# Altium PCB Driver4BusV1.1.PcbDoc
Units mm, origin at the board's own origin, x right, y up, seen from the top; angles counter-clockwise.
Board outline 160 x 100 mm, 4 copper layers (Top Layer, Internal Plane 1, Internal Plane 2, Bottom Layer); 96 components, 130 nets, 760 pads, 93 vias.
Unrouted connection lines stored in the file: 1.
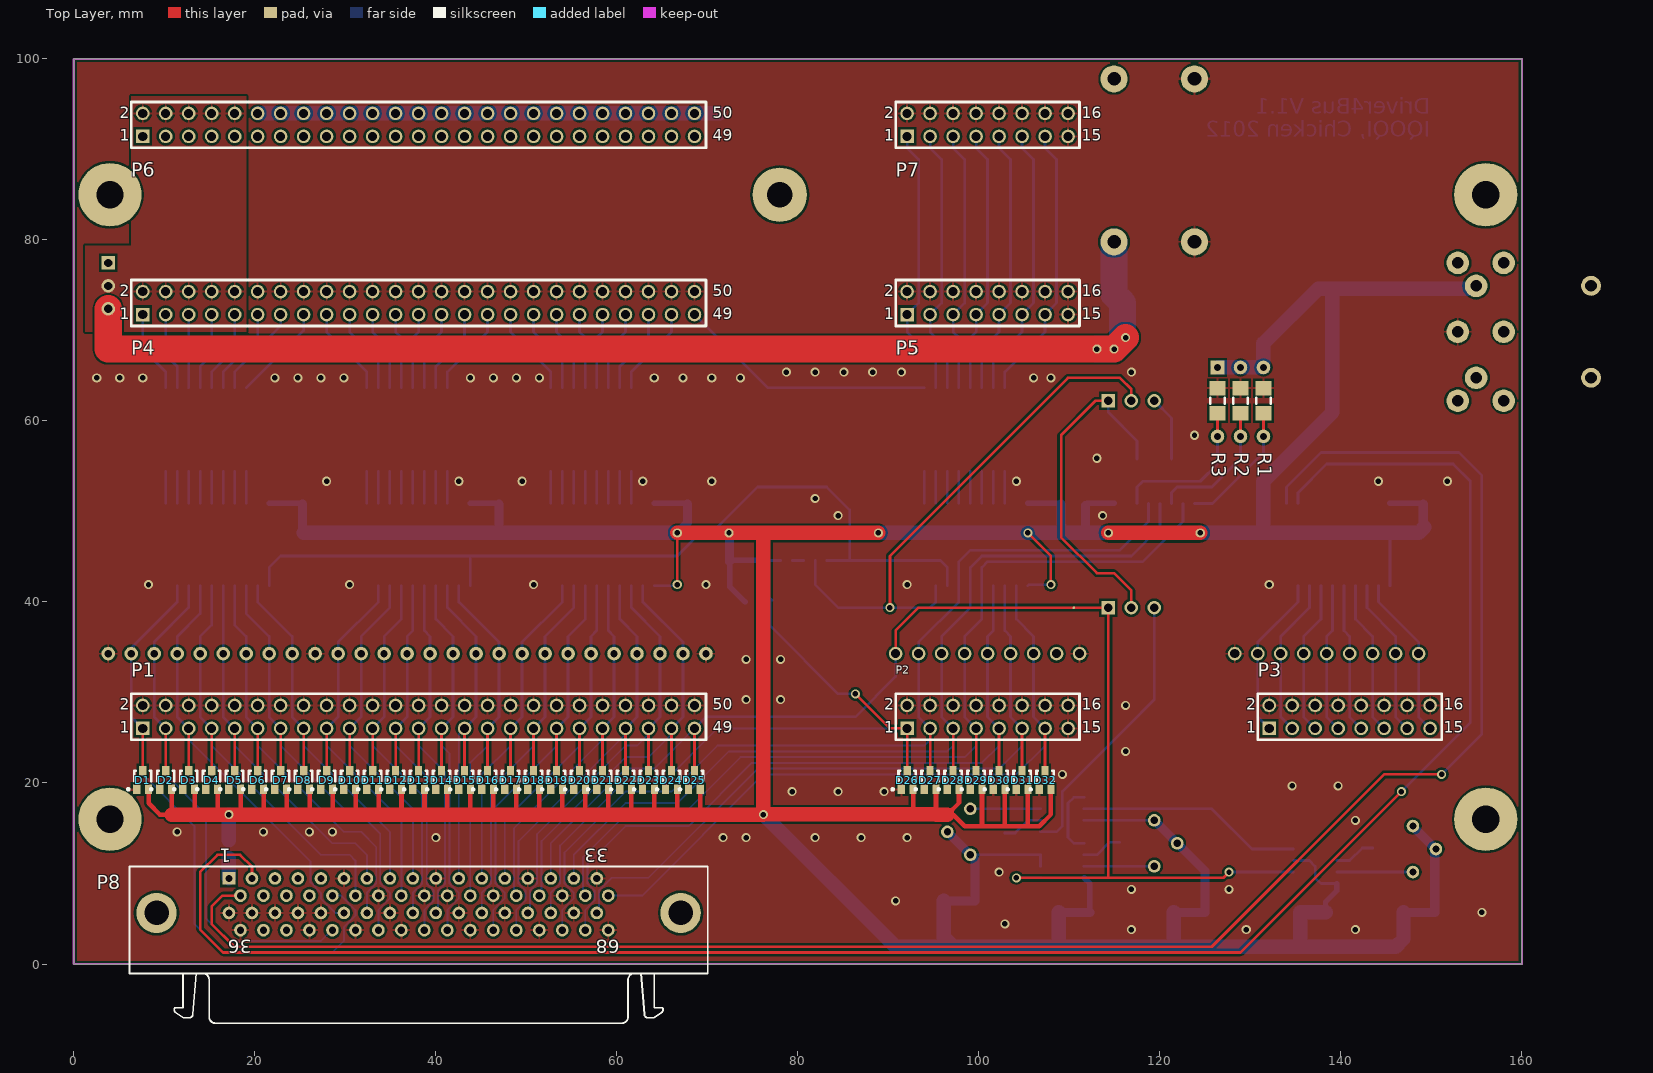
[diagram p0: Top Layer view]
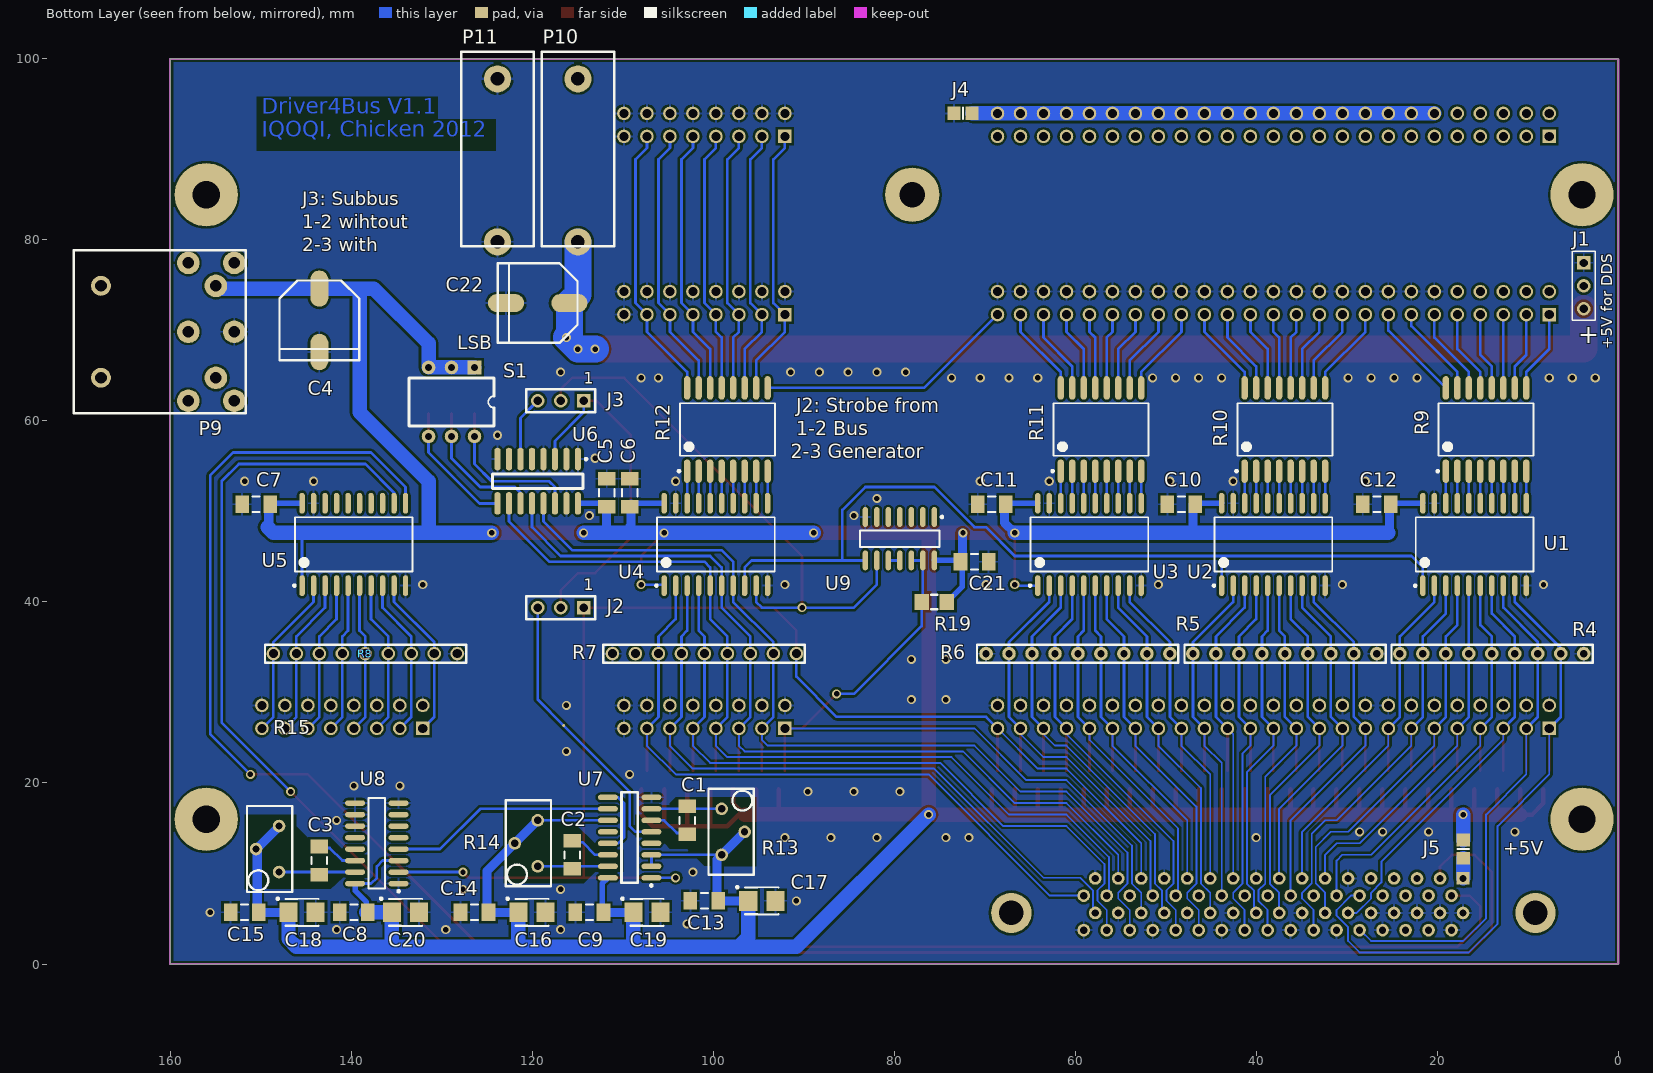
[diagram p1: Bottom Layer view, seen from below]
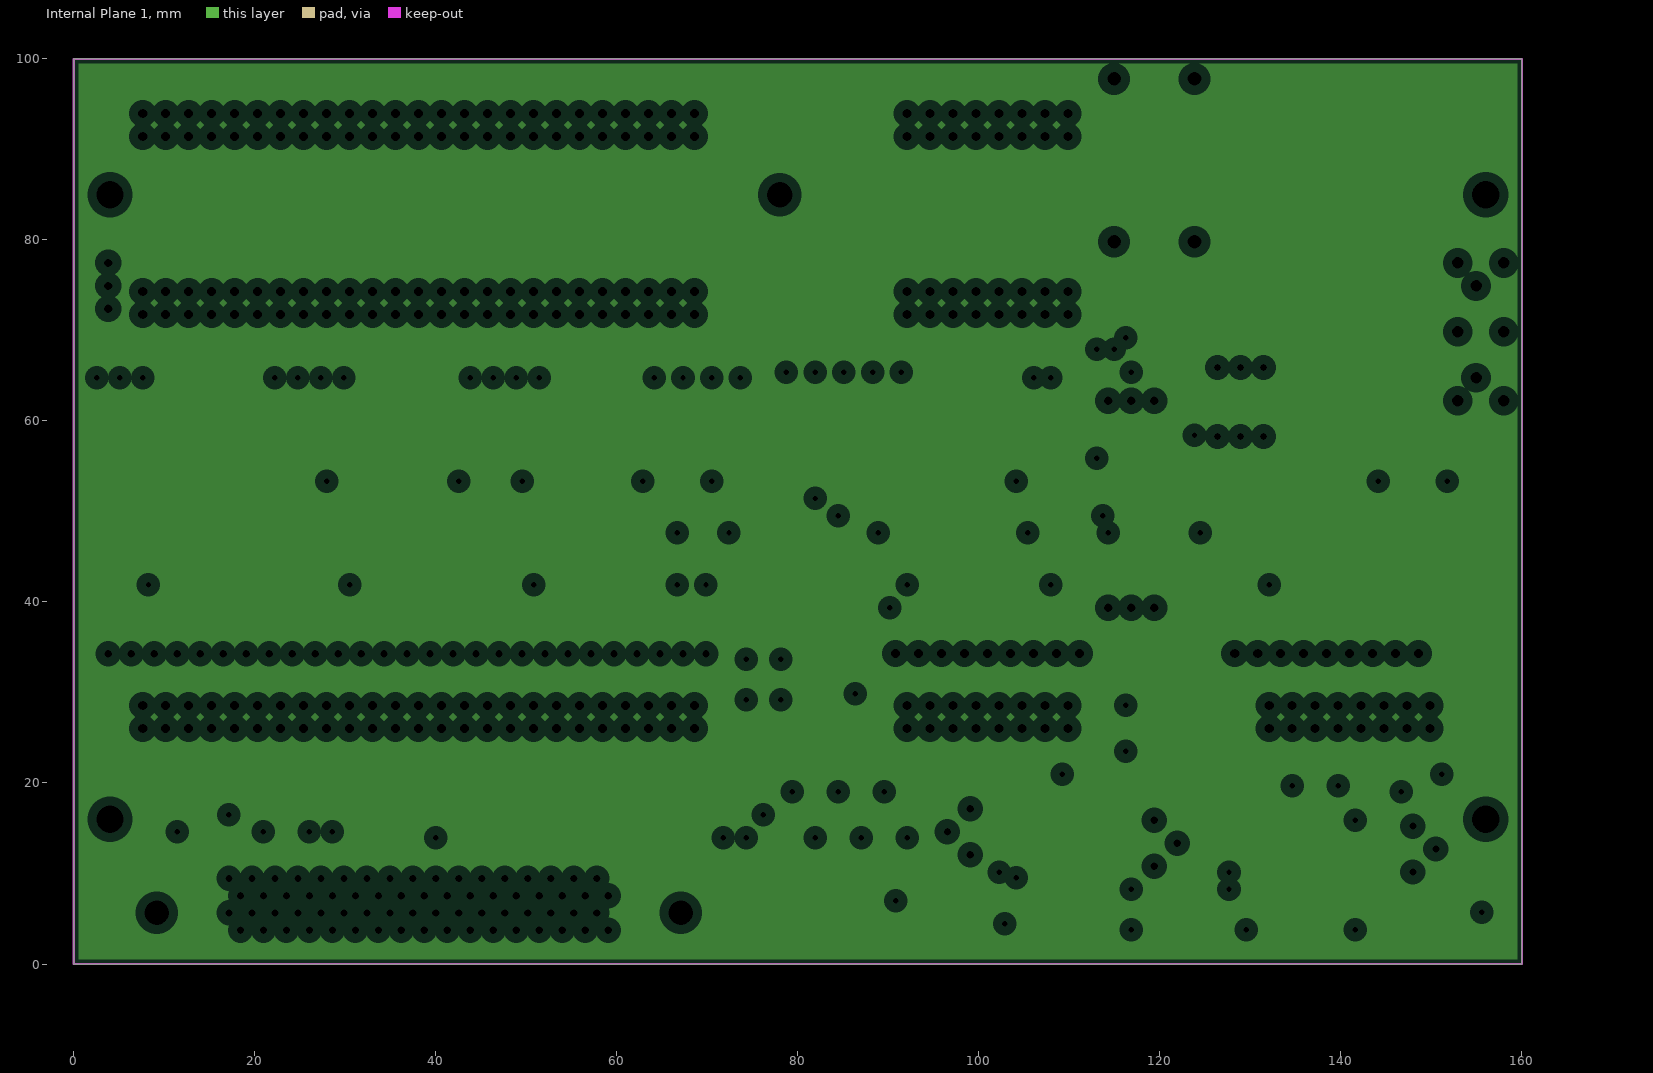
[diagram p2: Internal Plane 1, clearances drawn from the general rule]
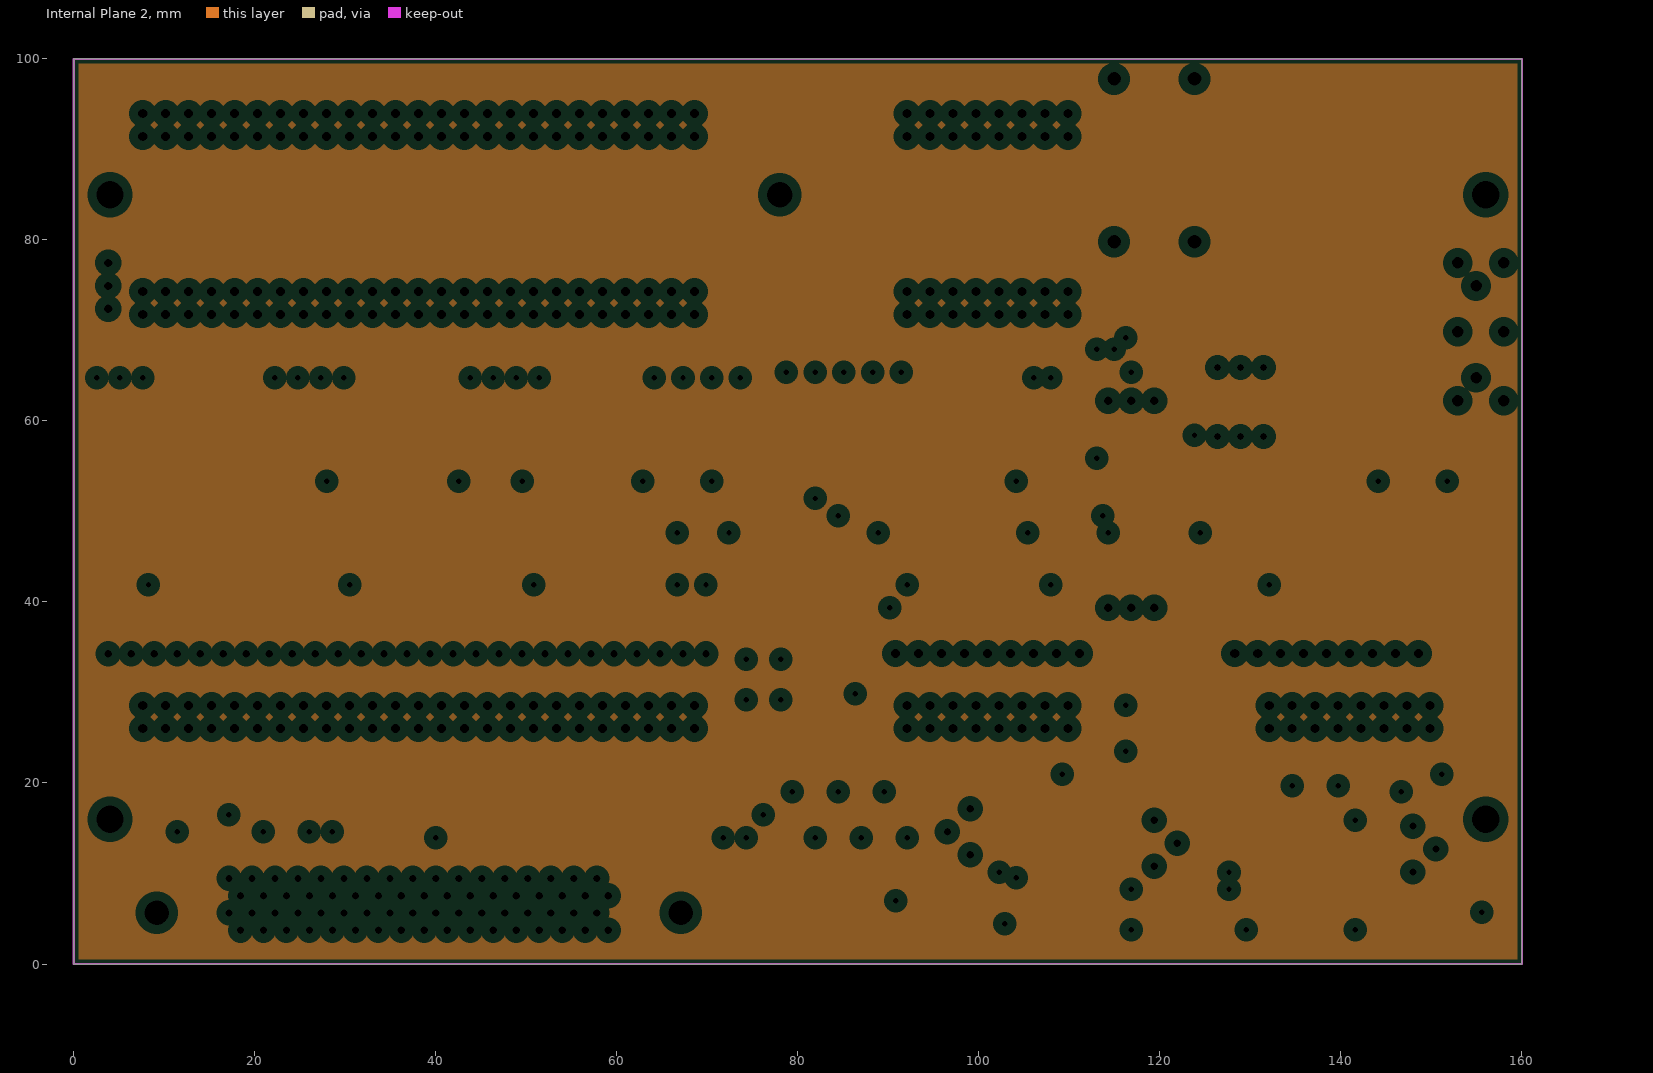
[diagram p3: Internal Plane 2, clearances drawn from the general rule]

## Layer stack, top to bottom
Top Solder: solder mask 0.0102, Solder Resist, Dk 3.5
Top Layer: signal copper 0.0356
Dielectric1: dielectric 0.32, FR-4, Dk 4.8
Internal Plane 1: plane copper 0.0356
Dielectric2: dielectric 0.32, FR-4, Dk 4.8
Internal Plane 2: plane copper 0.0356
Dielectric3: dielectric 0.32, FR-4, Dk 4.8
Bottom Layer: signal copper 0.0356
Bottom Solder: solder mask 0.0102, Solder Resist, Dk 3.5

## Board outline
0,0 160,0 160,90 160,100 0,100

## Design rules (kind name [scope] priority, off if disabled: settings)
Clearance [All] p1: gap=0.254
ComponentClearance ComponentClearance_1 [All] p2: gap=0.254 collisioncheckmode=3 verticalgap=0.254 showdistances=FALSE
FabricationTestPointUsage TestPointUsage [All] p1: valid=0 allowmultiple=FALSE
FabricationTestPointUsage TestPointUsage_1 [All] p2: valid=0 allowmultiple=FALSE
FabricationTestpoint Testpoint [All] p1: side=3 testpointundercomponent=TRUE minsize=1.016 maxsize=2.54 preferedsize=1.524 minholesize=0 maxholesize=1.016 preferedholesize=0.813 testpointgrid=0.025 allowsidetop=TRUE allowsidebottom=TRUE usegrid=TRUE gridtolerance=0
FabricationTestpoint Testpoint_1 [All] p2: side=3 testpointundercomponent=TRUE minsize=1.016 maxsize=2.54 preferedsize=1.524 minholesize=0 maxholesize=1.016 preferedholesize=0.813 testpointgrid=0.025 allowsidetop=TRUE allowsidebottom=TRUE usegrid=TRUE gridtolerance=0
FanoutControl Fanout_LCC [IsLCC] p1: bgadir=Out bgaviamode=Centered fanoutstyle=Auto fanoutdirection=Alternating viagrid=0.025 // Fanout_LCC (Default Rule)
FanoutControl Fanout_BGA [IsBGA] p2: bgadir=Out bgaviamode=Centered fanoutstyle=Auto fanoutdirection=Alternating viagrid=0.025 // Fanout_BGA (Default Rule)
FanoutControl Fanout_Small [(CompPinCount < 5)] p3: bgadir=Out bgaviamode=Centered fanoutstyle=Auto fanoutdirection=OutThenIn viagrid=0.025 // Fanout_Small (Default Rule)
FanoutControl Fanout_SOIC [IsSOIC] p4: bgadir=Out bgaviamode=Centered fanoutstyle=Auto fanoutdirection=Alternating viagrid=0.025 // Fanout_SOIC (Default Rule)
FanoutControl Fanout_BGA_1 [IsBGA] p6: bgadir=Out bgaviamode=Centered fanoutstyle=Auto fanoutdirection=Alternating viagrid=0.025 // Fanout_BGA (Default Rule)
FanoutControl Fanout_LCC_1 [IsLCC] p7: bgadir=Out bgaviamode=Centered fanoutstyle=Auto fanoutdirection=Alternating viagrid=0.025 // Fanout_LCC (Default Rule)
FanoutControl Fanout_SOIC_1 [IsSOIC] p8: bgadir=Out bgaviamode=Centered fanoutstyle=Auto fanoutdirection=Alternating viagrid=0.025 // Fanout_SOIC (Default Rule)
FanoutControl Fanout_Small_1 [(CompPinCount < 5)] p9: bgadir=Out bgaviamode=Centered fanoutstyle=Auto fanoutdirection=OutThenIn viagrid=0.025 // Fanout_Small (Default Rule)
FanoutControl Fanout_Default_1 [All] p10: bgadir=Out bgaviamode=Centered fanoutstyle=Auto fanoutdirection=Alternating viagrid=0.025 // Fanout_Default (Default Rule)
Height Height_1 [All] p2: minheight=0 maxheight=25.4 prefheight=12.7
HoleSize [All] p1: absolutevalues=TRUE maxlimit=3 minlimit=0.025 maxpercent=80.000 minpercent=20.000
LayerPairs LayerPairs_1 [All] p2: enforce=TRUE
PasteMaskExpansion PasteMaskExpansion_1 [All] p2: expansion=0
PlaneClearance [All] p1: clearance=1
PlaneConnect [All] p1: planeconnectstyle=Relief reliefexpansion=0.508 reliefentries=4 reliefconductorwidth=0.254 reliefairgap=0.254
PolygonConnect PolygonConnect_3 [(ObjectKind = 'Pad') And (Net = 'NetJ1_2') And (HoleDiameter = AsMM(0.9))] p1: connectstyle=Direct reliefconductorwidth=0.254 reliefentries=4 polygonreliefangle="90 Angle" airgapwidth=0.254
PolygonConnect PolygonConnect_2 [(ObjectKind = 'Via') And (Net = 'GND')] p2: connectstyle=Direct reliefconductorwidth=0.254 reliefentries=4 polygonreliefangle="90 Angle" airgapwidth=0.254
PolygonConnect PolygonConnect_1 [(ObjectKind = 'Pad') And (Net = 'NetP4_2') And (Component = 'P11')] p3: connectstyle=Direct reliefconductorwidth=0.254 reliefentries=4 polygonreliefangle="90 Angle" airgapwidth=0.254
PolygonConnect [All] p4: connectstyle=Relief reliefconductorwidth=0.254 reliefentries=4 polygonreliefangle="90 Angle" airgapwidth=0.254
RoutingLayers power [InNetClass('power')] p1: top layer_v5=TRUE bottom layer_v5=TRUE
RoutingLayers all [All] p2: top layer_v5=TRUE bottom layer_v5=TRUE
RoutingVias [All] p1: holewidth=0.6 width=1.6 viastyle="Through Hole" minholewidth=0.6 minwidth=1 maxholewidth=2 maxwidth=1.27
SilkToSolderMaskClearance SilkscreenOverComponentPads [IsPad] p1: minsilkscreentomaskgap=0.254 clearancetoexposedcopper=TRUE
SolderMaskExpansion [All] p1: expansion=0.102
SolderMaskExpansion SolderMaskExpansion_1 [All] p2: expansion=0.102
Width Width_power [InNetClass('power')] p1: maxlimit=1 minlimit=0.254 preferedwidth=0.5
Width [All] p2: maxlimit=3 minlimit=0.2 preferedwidth=0.3
18 further rules are at their usual default settings.

## Components (designator, comment, footprint, x,y, rotation, side; value= is the part's Value field where it differs from the comment)
C1 "Cap" CAPC3216M 102.87,15.875 r90 bottom
C2 "Cap" CAPC3216M 115.57,12.065 r270 bottom
C3 "Cap" CAPC3216M 143.51,11.43 r90 bottom
C4 "Cap Pol1" ElkoSMD8 143.51,71.12 r0 bottom
C5 "Cap" CAPC3216M 111.76,52.07 r270 bottom
C6 "Cap" CAPC3216M 109.22,52.07 r270 bottom
C7 "Cap" CAPC3216M 150.495,50.8 r180 bottom
C8 "Cap" CAPC3216M 139.7,5.715 r180 bottom
C9 "Cap" CAPC3216M 113.665,5.715 r180 bottom
C10 "Cap" CAPC3216M 48.26,50.8 r180 bottom
C11 "Cap" CAPC3216M 69.215,50.8 r180 bottom
C12 "Cap" CAPC3216M 26.67,50.8 r180 bottom
C13 "Cap" CAPC3216M 100.965,6.985 r180 bottom
C14 "Cap" CAPC3216M 126.365,5.715 r180 bottom
C15 "Cap" CAPC3216M 151.765,5.715 r180 bottom
C16 "Cap Pol1" TC3528-1411 120.015,5.715 r180 bottom
C17 "Cap Pol1" TC3528-1411 94.615,6.985 r180 bottom
C18 "Cap Pol1" TC3528-1411 145.415,5.715 r180 bottom
C19 "Cap Pol1" TC3528-1411 107.315,5.715 r180 bottom
C20 "Cap Pol1" TC3528-1411 133.985,5.715 r180 bottom
C21 "Cap" CAPC3216M 71.12,44.45 r0 bottom
C22 "Cap Pol1" ElkoSMD8 119.38,73.025 r90 bottom
D1 "1PS70SB14" SOT323 7.62,20.32 r0 top
D2 "1PS70SB14" SOT323 10.16,20.32 r0 top
D3 "1PS70SB14" SOT323 12.7,20.32 r0 top
D4 "1PS70SB14" SOT323 15.24,20.32 r0 top
D5 "1PS70SB14" SOT323 17.78,20.32 r0 top
D6 "1PS70SB14" SOT323 20.32,20.32 r0 top
D7 "1PS70SB14" SOT323 22.86,20.32 r0 top
D8 "1PS70SB14" SOT323 25.4,20.32 r0 top
D9 "1PS70SB14" SOT323 27.94,20.32 r0 top
D10 "1PS70SB14" SOT323 30.48,20.32 r0 top
D11 "1PS70SB14" SOT323 33.02,20.32 r0 top
D12 "1PS70SB14" SOT323 35.56,20.32 r0 top
D13 "1PS70SB14" SOT323 38.1,20.32 r0 top
D14 "1PS70SB14" SOT323 40.64,20.32 r0 top
D15 "1PS70SB14" SOT323 43.18,20.32 r0 top
D16 "1PS70SB14" SOT323 45.72,20.32 r0 top
D17 "1PS70SB14" SOT323 48.26,20.32 r0 top
D18 "1PS70SB14" SOT323 50.8,20.32 r0 top
D19 "1PS70SB14" SOT323 53.34,20.32 r0 top
D20 "1PS70SB14" SOT323 55.88,20.32 r0 top
D21 "1PS70SB14" SOT323 58.42,20.32 r0 top
D22 "1PS70SB14" SOT323 60.96,20.32 r0 top
D23 "1PS70SB14" SOT323 63.5,20.32 r0 top
D24 "1PS70SB14" SOT323 66.04,20.32 r0 top
D25 "1PS70SB14" SOT323 68.58,20.32 r0 top
D26 "1PS70SB14" SOT323 92.075,20.32 r0 top
D27 "1PS70SB14" SOT323 94.615,20.32 r0 top
D28 "1PS70SB14" SOT323 97.155,20.32 r0 top
D29 "1PS70SB14" SOT323 99.695,20.32 r0 top
D30 "1PS70SB14" SOT323 102.235,20.32 r0 top
D31 "1PS70SB14" SOT323 104.775,20.32 r0 top
D32 "1PS70SB14" SOT323 107.315,20.32 r0 top
J1 "Header 3" HDR1X3 3.81,77.47 r270 bottom
J2 "Generator" HDR1X3 114.3,39.37 r0 bottom
J3 "Subbus" HDR1X3 114.3,62.23 r0 bottom
J4 "Header 2" RESC2012M 72.39,93.98 r0 bottom
J5 "Header 2" RESC2012M 17.145,12.7 r270 bottom
P1 "Header 25X2" HDR2X25 7.62,26.035 r0 top
P2 "Header 8X2" HDR2X8 92.075,26.035 r0 top
P3 "Header 8X2" HDR2X8 132.08,26.035 r0 top
P4 "Header 25X2" HDR2X25 7.62,71.755 r0 top
P5 "Header 8X2" HDR2X8 92.075,71.755 r0 top
P6 "Header 25X2" HDR2X25 7.62,91.44 r0 top
P7 "Header 8X2" HDR2X8 92.075,91.44 r0 top
P8 "3-174682-7" 174225-5 38.1,-1.041 r180 top
P9 "Header 8" "DIN 8-polig V2" 167.64,69.85 r90 bottom
P10 "+5V DDS" "Banane on BCP" 114.935,88.79 r90 bottom
P11 "GND" "Banane on BCP" 123.825,88.79 r90 bottom
R1 "Res2" 3216[1206] 131.445,62.23 r270 top
R2 "Res2" 3216[1206] 128.905,62.23 r270 top
R3 "Res2" 3216[1206] 126.365,62.23 r270 top
R4 "Widerstandnetzwerk 4609X" "Widerstandnetzwerk 4609X"#1 3.81,34.29 r90 bottom
R5 "Widerstandnetzwerk 4609X" "Widerstandnetzwerk 4609X"#1 26.67,34.29 r90 bottom
R6 "Widerstandnetzwerk 4609X" "Widerstandnetzwerk 4609X"#1 69.85,34.29 r270 bottom
R7 "Widerstandnetzwerk 4609X" "Widerstandnetzwerk 4609X"#2 111.125,34.29 r270 bottom
R8 "Widerstandnetzwerk 4609X" "Widerstandnetzwerk 4609X"#2 128.27,34.29 r90 bottom
R9 "Res Pack2" SOIC-OE16_M 14.605,59.055 r90 bottom
R10 "Res Pack2" SOIC-OE16_M 36.83,59.055 r90 bottom
R11 "Res Pack2" SOIC-OE16_M 57.15,59.055 r90 bottom
R12 "Res Pack2" SOIC-OE16_M 98.425,59.055 r90 bottom
R13 "RPot" RPOT3 97.79,14.605 r0 bottom
R14 "RPot" RPOT3 120.65,13.335 r180 bottom
R15 "RPot" RPOT3 149.225,12.7 r180 bottom
R19 "Res2" 3216[1206] 75.565,40.005 r180 bottom
S1 "SW DIP-3" DIP-6 128.905,62.1 r0 bottom
U1 "74LVX245D" DW020_N 15.875,46.355 r90 bottom
U2 "74LVX245D" DW020_N 38.1,46.355 r90 bottom
U3 "74LVX245D" DW020_N 58.42,46.355 r90 bottom
U4 "74LVX245D" DW020_N 99.695,46.355 r90 bottom
U5 "74LVX245D" DW020_N 139.7,46.355 r90 bottom
U6 "74HC85" SO16_M 119.38,53.34 r270 bottom
U7 "74LV123" SO16_N 109.22,13.97 r0 bottom
U8 "74LV123" SO16_N 137.16,13.335 r0 bottom
U9 "74VHC00AD" 751A-02_N 79.375,46.99 r270 bottom

## Footprints (in the part's own frame and the unit in brackets; to place one, negate y for a bottom-side part, rotate by r counter-clockwise, add the part's x,y. Pads: shape width x height; smd on the part's side, far side on the other; paste and mask are expansions set on the pad)
751A-02_N [mm] "SOIC, 14-Leads, Body 8.7x3.9mm, Pitch 1.27mm, IPC Medium Density"
  oval 2.2x0.6 smd: 1(-2.4,3.81) 2(-2.4,2.54) 3(-2.4,1.27) 4(-2.4,0) 5(-2.4,-1.27) 6(-2.4,-2.54) 7(-2.4,-3.81) 8(2.4,-3.81) 9(2.4,-2.54) 10(2.4,-1.27) 11(2.4,0) 12(2.4,1.27) 13(2.4,2.54) 14(2.4,3.81)
  silkscreen extent -2.52,-4.4 0.9,4.78, body extent -1.95,-4.33 1.95,4.33, height 1.75
3216[1206] [mm] "Chip Resistor; Body 3.2 x 1.6 mm (LxW typ)"
  rect 1.6x1.8 smd: 1(-1.4,0) 2(1.4,0)
  silkscreen extent -0.3,-0.8 0.3,0.8
174225-5 [mm] "Connector; D Subminiature 050 Series; 68 Position; Right Angle"
  rect 1.4x1.4 hole 0.8: 1(20.955,-10.5)
  round 1.4 hole 0.8: 2(19.685,-8.595) 3(18.415,-10.5) 4(17.145,-8.595) 5(15.875,-10.5) 6(14.605,-8.595) 7(13.335,-10.5) 8(12.065,-8.595) 9(10.795,-10.5) 10(9.525,-8.595) 11(8.255,-10.5) 12(6.985,-8.595) 13(5.715,-10.5) 14(4.445,-8.595) 15(3.175,-10.5) 16(1.905,-8.595) 17(0.635,-10.5) 18(-0.635,-8.595) 19(-1.905,-10.5) 20(-3.175,-8.595) 21(-4.445,-10.5) 22(-5.715,-8.595) 23(-6.985,-10.5) 24(-8.255,-8.595) 25(-9.525,-10.5) 26(-10.795,-8.595) 27(-12.065,-10.5) 28(-13.335,-8.595) 29(-14.605,-10.5) 30(-15.875,-8.595) 31(-17.145,-10.5) 32(-18.415,-8.595) 33(-19.685,-10.5) 34(-20.955,-8.595) 35(20.955,-6.69) 36(19.685,-4.785) 37(18.415,-6.69) 38(17.145,-4.785) 39(15.875,-6.69) 40(14.605,-4.785) 41(13.335,-6.69) 42(12.065,-4.785) 43(10.795,-6.69) 44(9.525,-4.785) 45(8.255,-6.69) 46(6.985,-4.785) 47(5.715,-6.69) 48(4.445,-4.785) 49(3.175,-6.69) 50(1.905,-4.785) 51(0.635,-6.69) 52(-0.635,-4.785) 53(-1.905,-6.69) 54(-3.175,-4.785) 55(-4.445,-6.69) 56(-5.715,-4.785) 57(-6.985,-6.69) 58(-8.255,-4.785) 59(-9.525,-6.69) 60(-10.795,-4.785) 61(-12.065,-6.69) 62(-13.335,-4.785) 63(-14.605,-6.69) 64(-15.875,-4.785) 65(-17.145,-6.69) 66(-18.415,-4.785) 67(-19.685,-6.69) 68(-20.955,-4.785)
  round 4.45 hole 2.7: 69(28.955,-6.69) 70(-28.955,-6.69)
  silkscreen extent -31.95,-11.8 31.95,5.5
"Banane on BCP" [mm]
  round 3 hole 1.5: 1(-9,0) 1(9,0)
  silkscreen extent -9.5,-4 12,4
CAPC3216M [mm] "Chip Capacitor, Body 3.2x1.6mm, IPC Low Density"
  rect 1.5x1.9 smd: 1(-1.55,0) 2(1.55,0)
  silkscreen extent -0.4,-0.85 0.4,0.85, body extent -1.7,-0.9 1.7,0.9, height 1.35
"DIN 8-polig V2" [mm]
  round 2.2 hole 1.3: 0(-5.08,0) 0(5.08,0)
  round 2.5 hole 1.3: 1(-7.62,-9.652) 2(0,-9.652) 3(7.62,-9.652) 4(-5.08,-12.7) 5(5.08,-12.7) 6(-7.62,-14.732) 7(7.62,-14.732) 8(0,-14.732)
  silkscreen extent -9,-16 9,3
DIP-6 [mm] "DIP; 6 Leads; Row Spacing 7.62 mm; Pitch 2.54 mm"
  rect 1.5x1.5 hole 0.8: 1(-2.54,-3.81)
  round 1.5 hole 0.8: 2(0,-3.81) 3(2.54,-3.81) 4(2.54,3.81) 5(0,3.81) 6(-2.54,3.81)
  silkscreen extent -4.7,-2.65 4.7,2.65
DW020_N [mm] "SOIC, 20-Leads, Body 12.8x7.5mm, Pitch 1.27mm, IPC Medium Density"
  oval 2.3x0.6 smd: 1(-4.55,5.715) 2(-4.55,4.445) 3(-4.55,3.175) 4(-4.55,1.905) 5(-4.55,0.635) 6(-4.55,-0.635) 7(-4.55,-1.905) 8(-4.55,-3.175) 9(-4.55,-4.445) 10(-4.55,-5.715) 11(4.55,-5.715) 12(4.55,-4.445) 13(4.55,-3.175) 14(4.55,-1.905) 15(4.55,-0.635) 16(4.55,0.635) 17(4.55,1.905) 18(4.55,3.175) 19(4.55,4.445) 20(4.55,5.715)
  silkscreen extent -4.67,-6.5 3,6.69, body extent -3.75,-6.4 3.75,6.4, height 2.65
ElkoSMD8 [mm] "loe ESR Elko, D:8mm"
  oval 2x4 smd: 1(0,-3.5) 2(0,3.5)
  silkscreen extent -4.4,-4.4 4.4,4.4
HDR1X3 [mm] "Connector; Header; 3 Position"
  rect 1.5x1.5 hole 0.9: 1(0,0)
  round 1.5 hole 0.9: 2(2.54,0) 3(5.08,0)
  silkscreen extent -1.27,-1.27 6.35,1.27
HDR2X8 [mm] "Connector; Header; 8x2 Position"
  rect 1.5x1.5 hole 1: 1(0,0)
  round 1.5 hole 1: 2(0,2.54) 3(2.54,0) 4(2.54,2.54) 5(5.08,0) 6(5.08,2.54) 7(7.62,0) 8(7.62,2.54) 9(10.16,0) 10(10.16,2.54) 11(12.7,0) 12(12.7,2.54) 13(15.24,0) 14(15.24,2.54) 15(17.78,0) 16(17.78,2.54)
  silkscreen extent -1.27,-1.27 19.05,3.81
HDR2X25 [mm] "Connector; Header; 25x2 Position"
  rect 1.5x1.5 hole 1: 1(0,0)
  round 1.5 hole 1: 2(0,2.54) 3(2.54,0) 4(2.54,2.54) 5(5.08,0) 6(5.08,2.54) 7(7.62,0) 8(7.62,2.54) 9(10.16,0) 10(10.16,2.54) 11(12.7,0) 12(12.7,2.54) 13(15.24,0) 14(15.24,2.54) 15(17.78,0) 16(17.78,2.54) 17(20.32,0) 18(20.32,2.54) 19(22.86,0) 20(22.86,2.54) 21(25.4,0) 22(25.4,2.54) 23(27.94,0) 24(27.94,2.54) 25(30.48,0) 26(30.48,2.54) 27(33.02,0) 28(33.02,2.54) 29(35.56,0) 30(35.56,2.54) 31(38.1,0) 32(38.1,2.54) 33(40.64,0) 34(40.64,2.54) 35(43.18,0) 36(43.18,2.54) 37(45.72,0) 38(45.72,2.54) 39(48.26,0) 40(48.26,2.54) 41(50.8,0) 42(50.8,2.54) 43(53.34,0) 44(53.34,2.54) 45(55.88,0) 46(55.88,2.54) 47(58.42,0) 48(58.42,2.54) 49(60.96,0) 50(60.96,2.54)
  silkscreen extent -1.27,-1.27 62.23,3.81
RESC2012M [mm] "Chip Resistor, Body 2.0x1.3mm, IPC Low Density"
  rect 1.4x1.5 smd: 1(-1,0) 2(1,0)
  silkscreen extent 0,-0.65 0,0.65, body extent -1.07,-0.7 1.07,0.7, height 0.65
RPOT3 [mm] "Poti Y"
  round 1.4 hole 0.8: 1(1.27,-2.54) 2(-1.27,0) 3(1.27,2.54)
  silkscreen extent -2.27,-4.75 2.73,4.75
SO16_M [mm] "SOIC, 16-Leads, Body 9.9x3.9mm, Pitch 1.27mm, IPC Low Density"
  oval 2.5x0.7 smd: 1(-2.45,4.445) 2(-2.45,3.175) 3(-2.45,1.905) 4(-2.45,0.635) 5(-2.45,-0.635) 6(-2.45,-1.905) 7(-2.45,-3.175) 8(-2.45,-4.445) 9(2.45,-4.445) 10(2.45,-3.175) 11(2.45,-1.905) 12(2.45,-0.635) 13(2.45,0.635) 14(2.45,1.905) 15(2.45,3.175) 16(2.45,4.445)
  silkscreen extent -2.57,-5 0.8,5.47, body extent -2,-5 2,5, height 1.75
SO16_N [mm] "SOIC, 16-Leads, Body 9.9x3.9mm, Pitch 1.27mm, IPC Medium Density"
  oval 2.2x0.6 smd: 1(-2.4,4.445) 2(-2.4,3.175) 3(-2.4,1.905) 4(-2.4,0.635) 5(-2.4,-0.635) 6(-2.4,-1.905) 7(-2.4,-3.175) 8(-2.4,-4.445) 9(2.4,-4.445) 10(2.4,-3.175) 11(2.4,-1.905) 12(2.4,-0.635) 13(2.4,0.635) 14(2.4,1.905) 15(2.4,3.175) 16(2.4,4.445)
  silkscreen extent -2.52,-5 0.9,5.42, body extent -1.95,-4.95 1.95,4.95, height 1.75
SOIC-OE16_M [mm] "SOIC, 16-Leads, Body 10.3x7.5mm, Pitch 1.27mm, IPC Low Density"
  oval 2.6x0.7 smd: 1(-4.6,4.445) 2(-4.6,3.175) 3(-4.6,1.905) 4(-4.6,0.635) 5(-4.6,-0.635) 6(-4.6,-1.905) 7(-4.6,-3.175) 8(-4.6,-4.445) 9(4.6,-4.445) 10(4.6,-3.175) 11(4.6,-1.905) 12(4.6,-0.635) 13(4.6,0.635) 14(4.6,1.905) 15(4.6,3.175) 16(4.6,4.445)
  silkscreen extent -4.72,-5.25 2.9,5.47, body extent -3.75,-5.25 3.75,5.25, height 2.65
SOT323 [mm] "SOT-323/SC-70; 3 Leads; Body 2.2 x 2.2 mm, inc. leads (LxW max)"
  rect 0.8x1.05 smd: 1(-0.65,-1.025) 2(0.65,-1.025) 3(0,1.025)
  silkscreen extent -1.72,-1.15 0.95,1.02
TC3528-1411 [mm] "Capacitor, SM Tantalum; Body 3.5 x 2.8 mm (LxW typ)"
  rect 2x2.2 smd: 1(-1.5,0) 2(1.5,0)
  silkscreen extent -2.83,-1.5 1.85,1.62
"Widerstandnetzwerk 4609X"#1 [mm]
  round 1.5 hole 0.8: 1(0,0) 2(0,2.54) 3(0,5.08) 4(0,7.62) 5(0,10.16) 6(0,12.7) 7(0,15.24) 8(0,17.78) 9(0,20.32)
  silkscreen extent -1,-1 1,21.25
"Widerstandnetzwerk 4609X"#2 [mm]
  round 1.5 hole 1: 1(0,0) 2(0,2.54) 3(0,5.08) 4(0,7.62) 5(0,10.16) 6(0,12.7) 7(0,15.24) 8(0,17.78) 9(0,20.32)
  silkscreen extent -1,-1 1,21.25

## Part data
C1 C2 C3 C5 C6 C7 C8 C9 C10 C11 C12 C13 C14 C15 C21: "Capacitor"
C4 C16 C17 C18 C19 C20 C22: "Polarized Capacitor (Radial)"
D1 D2 D3 D4 D5 D6 D7 D8 D9 D10 D11 D12 D13 D14 D15 D16 D17 D18 D19 D20 D21 D22 D23 D24 D25 D26 D27 D28 D29 D30 D31 D32: "Schottky Barrier Double Diode"
J1: "Header, 3-Pin"
J2 J3: library part "Header 3", "Header, 3-Pin"
J4 J5: "Header, 2-Pin"
P1 P4 P6: "Header, 25-Pin, Dual row"
P2 P3 P5 P7: "Header, 8-Pin, Dual row"
P8: "Plug Assembly, Horizontal with Kink"
P9: "Header, 8-Pin"
P10 P11: library part Socket, "Socket"
R1 R2 R3 R19: "Resistor"
R9 R10 R11 R12: "Isolated Resistor Network - Parts"
R13 R14 R15: "Potentiometer"
S1: "DIP Switch, 3 Position, SPST"
U1 U2 U3 U4 U5: library part SN74HC245DW, "Octal Bus Transceiver with 3-State Outputs"
U6: library part M74HC85M1R, "4-Bit Magnitude Comparator"
U7 U8: library part M74HC123AM1R, "Dual Retriggerable Monostable Multivibrator"
U9: library part MC74HC00AD, "Quad 2-Input NAND Gate"

## Free pads (board coordinates)
  round 6 hole 2.8: 2(78,85)
  round 7 hole 3: 4(156,85) 5(156,16) 7(4,16) 8(4,85)
  round 0.5 smd: EndPad(17.145,16.51) StartPad(36.21,19.295)
  round 0.3 smd: EndPad(110.49,39.37) StartPad(114.3,39.37) StartPad(116.84,62.23)
  round 0.3 smd far side: EndPad(116.522,26.352) StartPad(118.745,50.89) StartPad(119.38,39.37) StartPad(120.015,50.89) StartPad(122.555,50.89)

## Via types
v1: diameter 1, hole 0.6, Top Layer to Bottom Layer, 93 vias

## Nets (pads, with @x,y where several pads share a name; then routed paths per layer and width w, separated by ;. In a path a pad name is that pad's centre, name@x,y a point inside that pad or via, vN(x,y) a via of type N, cw(c..) or ccw(c..) an arc to the next point about the centre after c; other vN are vias at no path point)
+5V: C22.1 J1.3 P10.1 | length 132.2
  Top Layer w3: J1.3 3.81,67.945 v1(113.03,67.945) v1(114.935,67.945) v1(116.205,69.215)
  Bottom Layer w3: v1(113.03,67.945) v1(114.935,67.945) v1(116.205,69.215) 115.88,69.54 C22.1 114.935,73.97 P10.1@114.935,79.79
+5V-NI: J5.2 P8.1 | length 2.2
  Bottom Layer w1.6: P8.1 J5.2
ACK1: P8.3 U5.12 | length 215.6
  Top Layer w0.3: P8.3 19.685,10.759 18.379,12.065 15.875,12.065 13.97,10.16 13.97,3.81 16.51,1.27 128.905,1.27 v1(146.685,19.05)
  Bottom Layer w0.3: U5.12 135.255,52.07 138.43,55.245 152.4,55.245 154.305,53.34 154.305,26.67 v1(146.685,19.05)
"CLOCK IN I": P3.1 R8.2 U5.9 | length 18.1
  Bottom Layer w0.3: P3.1 130.81,27.305 R8.2 130.81,35.56 135.255,40.005 U5.9
DIOA00: P4.1 R9.9 | length 9.2
  Bottom Layer w0.3: P4.1 7.62,67.945 10.16,65.405 R9.9
DIOA0: D1.3 P1.1 P8.10 R4.2 U1.9 | length 72.6
  Top Layer w0.3: D1.3 P1.1
  Bottom Layer w0.2: P1.1 7.62,20.955 13.335,15.24 13.335,4.445 16.51,1.27 28.575,1.27 29.845,2.54 29.845,4.064 31.115,5.334 31.115,5.969 29.53,7.554 P8.10
  Bottom Layer w0.3: P1.1 6.35,27.305 R4.2 6.35,34.925 11.43,40.005 U1.9
DIOA1: D2.3 P1.3 P8.44 R4.3 U1.8 | length 60.9
  Top Layer w0.3: D2.3 P1.3
  Bottom Layer w0.2: P1.3 10.16,20.955 14.605,16.51 14.605,5.08 17.145,2.54 27.305,2.54 28.509,3.744 P8.44
  Bottom Layer w0.3: P1.3 8.89,27.305 R4.3 8.89,35.56 12.7,39.37 U1.8
DIOA2: D3.3 P1.5 P8.45 R4.4 U1.7 | length 50.1
  Top Layer w0.3: D3.3 P1.5
  Bottom Layer w0.2: P1.5 12.7,24.765 26.162,11.303 26.162,9.017 27.305,7.874 27.305,7.239 28.895,5.649 P8.45
  Bottom Layer w0.3: P1.5 11.43,27.305 R4.4 11.43,36.195 13.97,38.735 U1.7
DIOA3: D4.3 P1.7 P8.12 R4.5 U1.6 | length 48.4
  Top Layer w0.3: D4.3 P1.7
  Bottom Layer w0.2: P1.7 15.24,24.13 27.305,12.065 30.48,12.065 31.115,11.43 P8.12
  Bottom Layer w0.3: P1.7 13.97,27.305 R4.5 13.97,36.195 15.24,37.465 U1.6
DIOA4: D5.3 P1.9 P8.13 R4.6 U1.5 | length 45.1
  Top Layer w0.3: D5.3 P1.9
  Bottom Layer w0.2: P1.9 17.78,24.13 28.575,13.335 31.115,13.335 32.385,12.065 P8.13
  Bottom Layer w0.3: U1.5 R4.6 16.51,27.305 P1.9
DIOA5: D6.3 P1.11 P8.47 R4.7 U1.4 | length 48.9
  Top Layer w0.3: D6.3 P1.11
  Bottom Layer w0.2: P1.11 20.32,24.13 29.845,14.605 31.75,14.605 33.426,12.929 33.426,8.915 32.385,7.874 P8.47
  Bottom Layer w0.3: U1.4 17.78,37.465 19.05,36.195 R4.7 19.05,27.305 P1.11
DIOA6: D7.3 P1.13 P8.48 R4.8 U1.3 | length 50.6
  Top Layer w0.3: D7.3 P1.13
  Bottom Layer w0.2: P1.13 22.86,24.13 31.115,15.875 32.385,15.875 33.858,14.402 33.858,8.941 34.925,7.874 34.925,7.239 33.655,5.969 P8.48
  Bottom Layer w0.3: U1.3 19.05,38.735 21.59,36.195 R4.8 21.59,27.305 P1.13
DIOA7: D8.3 P1.15 P8.15 R4.9 U1.2 | length 43.1
  Top Layer w0.3: D8.3 P1.15
  Bottom Layer w0.2: P1.15 25.4,24.13 34.925,14.605 P8.15
  Bottom Layer w0.3: U1.2 20.32,40.005 24.13,36.195 R4.9 24.13,27.305 P1.15
DIOA10: P4.3 R9.10 | length 8.6
  Bottom Layer w0.3: P4.3 10.16,67.31 11.43,66.04 R9.10
DIOA20: P4.5 R9.11 | length 8.1
  Bottom Layer w0.3: R9.11 P4.5
DIOA30: P4.7 R9.12 | length 8.6
  Bottom Layer w0.3: R9.12 13.97,66.04 15.24,67.31 P4.7
DIOA40: P4.9 R9.13 | length 9.2
  Bottom Layer w0.3: R9.13 15.24,65.405 17.78,67.945 P4.9
DIOA50: P4.11 R9.14 | length 9.7
  Bottom Layer w0.3: R9.14 16.51,65.405 20.32,69.215 P4.11
DIOA60: P4.13 R9.15 | length 10.2
  Bottom Layer w0.3: R9.15 17.78,65.405 22.86,70.485 P4.13
DIOA70: P4.15 R9.16 | length 10.7
  Bottom Layer w0.3: R9.16 25.4,70.005 P4.15
DIOB00: P4.17 R10.9 | length 9.9
  Bottom Layer w0.3: P4.17 27.94,69.85 32.385,65.405 R10.9
DIOB0: D9.3 P1.17 P8.16 R5.2 U2.9 | length 44.7
  Top Layer w0.3: D9.3 P1.17
  Bottom Layer w0.2: P1.17 27.94,24.13 36.195,15.875 P8.16
  Bottom Layer w0.3: P1.17 29.21,27.305 R5.2 29.21,35.56 33.655,40.005 U2.9
DIOB1: D10.3 P1.19 P8.17 R5.3 U2.8 | length 41.8
  Top Layer w0.3: D10.3 P1.19
  Bottom Layer w0.2: P1.19 30.48,24.13 37.465,17.145 P8.17
  Bottom Layer w0.3: P1.19 31.75,27.305 R5.3 31.75,36.195 34.925,39.37 U2.8
DIOB2: D11.3 P1.21 P8.51 R5.4 U2.7 | length 44.8
  Top Layer w0.3: D11.3 P1.21
  Bottom Layer w0.2: P1.21 33.02,24.13 38.481,18.669 38.481,8.89 37.465,7.874 P8.51
  Bottom Layer w0.3: P1.21 34.29,27.305 R5.4 34.29,36.195 36.195,38.1 U2.7
DIOB3: D12.3 P1.23 P8.52 R5.5 U2.6 | length 45.7
  Top Layer w0.3: D12.3 P1.23
  Bottom Layer w0.2: P1.23 35.56,24.13 38.989,20.701 38.989,8.89 39.751,8.128 39.751,6.985 38.735,5.969 P8.52
  Bottom Layer w0.3: P1.23 36.83,27.305 R5.5 36.83,36.195 37.465,36.83 U2.6
DIOB4: D13.3 P1.25 P8.53 R5.6 U2.5 | length 43.3
  Top Layer w0.3: D13.3 P1.25
  Bottom Layer w0.2: P1.25 38.1,24.13 41.021,21.209 41.021,8.89 40.259,8.128 40.259,5.903 P8.53
  Bottom Layer w0.3: P1.25 39.37,27.305 R5.6 39.37,36.195 38.735,36.83 U2.5
DIOB5: D14.3 P1.27 P8.54 R5.7 U2.4 | length 45.4
  Top Layer w0.3: D14.3 P1.27
  Bottom Layer w0.2: P1.27 40.64,24.13 41.529,23.241 41.529,8.89 42.545,7.874 42.545,7.239 41.275,5.969 P8.54
  Bottom Layer w0.3: U2.4 40.005,38.1 41.91,36.195 R5.7 41.91,27.305 P1.27
DIOB6: D15.3 P1.29 P8.21 R5.8 U2.3 | length 39.1
  Top Layer w0.3: D15.3 P1.29
  Bottom Layer w0.2: P8.21 42.545,25.4 P1.29
  Bottom Layer w0.3: U2.3 41.275,39.37 44.45,36.195 R5.8 44.45,27.305 P1.29
DIOB7: D16.3 P1.31 P8.22 R5.9 U2.2 | length 42.1
  Top Layer w0.3: D16.3 P1.31
  Bottom Layer w0.2: P8.22 43.815,22.225 45.72,24.13 P1.31
  Bottom Layer w0.3: U2.2 42.545,40.005 46.99,35.56 R5.9 46.99,27.305 P1.31
DIOB10: P4.19 R10.10 | length 9.4
  Bottom Layer w0.3: P4.19 30.48,69.85 33.655,66.675 R10.10
DIOB20: P4.21 R10.11 | length 8.9
  Bottom Layer w0.3: P4.21 33.02,69.85 34.925,67.945 R10.11
DIOB30: P4.23 R10.12 | length 8.4
  Bottom Layer w0.3: P4.23 35.56,69.85 36.195,69.215 R10.12
DIOB40: P4.25 R10.13 | length 8.4
  Bottom Layer w0.3: R10.13 37.465,69.215 38.1,69.85 P4.25
DIOB50: P4.27 R10.14 | length 8.9
  Bottom Layer w0.3: R10.14 38.735,67.945 40.64,69.85 P4.27
DIOB60: P4.29 R10.15 | length 9.4
  Bottom Layer w0.3: R10.15 40.005,66.04 43.18,69.215 P4.29
DIOB70: P4.31 R10.16 | length 9.9
  Bottom Layer w0.3: R10.16 41.275,65.405 45.72,69.85 P4.31
DIOC00: P4.33 R11.9 | length 9.9
  Bottom Layer w0.3: P4.33 48.26,69.85 52.705,65.405 R11.9
DIOC0: D17.3 P1.33 P8.23 R6.9 U3.9 | length 40.7
  Top Layer w0.3: D17.3 P1.33
  Bottom Layer w0.2: P8.23 45.085,20.955 48.26,24.13 P1.33
  Bottom Layer w0.3: P1.33 49.53,27.305 R6.9 49.53,35.56 53.975,40.005 U3.9
DIOC1: D18.3 P1.35 P8.57 R6.8 U3.8 | length 45.1
  Top Layer w0.3: D18.3 P1.35
  Bottom Layer w0.2: P8.57 45.085,7.874 46.101,8.89 46.101,19.431 50.8,24.13 P1.35
  Bottom Layer w0.3: P1.35 52.07,27.305 R6.8 52.07,36.195 55.245,39.37 U3.8
DIOC2: D19.3 P1.37 P8.58 R6.7 U3.7 | length 47.8
  Top Layer w0.3: D19.3 P1.37
  Bottom Layer w0.2: P8.58 46.355,5.969 47.625,7.239 47.625,7.874 46.609,8.89 46.609,17.399 53.34,24.13 P1.37
  Bottom Layer w0.3: P1.37 54.61,27.305 R6.7 54.61,36.195 56.515,38.1 U3.7
DIOC3: D20.3 P1.39 P8.25 R6.6 U3.6 | length 41.2
  Top Layer w0.3: D20.3 P1.39
  Bottom Layer w0.2: P8.25 47.625,15.875 55.88,24.13 P1.39
  Bottom Layer w0.3: P1.39 57.15,27.305 R6.6 57.15,36.195 57.785,36.83 U3.6
DIOC4: D21.3 P1.41 P8.26 R6.5 U3.5 | length 43.9
  Top Layer w0.3: D21.3 P1.41
  Bottom Layer w0.2: P8.26 48.641,7.808 48.641,14.986 58.42,24.765 P1.41
  Bottom Layer w0.3: P1.41 59.69,27.305 R6.5 59.69,36.195 59.055,36.83 U3.5
DIOC5: D22.3 P1.43 P8.60 R6.4 U3.4 | length 49.7
  Top Layer w0.3: D22.3 P1.43
  Bottom Layer w0.2: P8.60 48.895,5.969 49.911,6.985 49.911,8.128 49.149,8.89 49.149,13.589 60.96,25.4 P1.43
  Bottom Layer w0.3: U3.4 60.325,38.1 62.23,36.195 R6.4 62.23,27.305 P1.43
DIOC6: D23.3 P1.45 P8.61 R6.3 U3.3 | length 49
  Top Layer w0.3: D23.3 P1.45
  Bottom Layer w0.2: P8.61 50.419,5.903 50.419,8.128 51.181,8.89 51.181,14.351 60.96,24.13 62.23,24.13 63.5,25.4 P1.45
  Bottom Layer w0.3: U3.3 61.595,39.37 64.77,36.195 R6.3 64.77,27.305 P1.45
DIOC7: D24.3 P1.47 P8.28 R6.2 U3.2 | length 48.8
  Top Layer w0.3: D24.3 P1.47
  Bottom Layer w0.2: P8.28 51.689,7.808 51.689,13.589 60.96,22.86 63.5,22.86 66.04,25.4 P1.47
  Bottom Layer w0.3: U3.2 62.865,40.005 67.31,35.56 R6.2 67.31,27.305 P1.47
DIOC10: P4.35 R11.10 | length 9.4
  Bottom Layer w0.3: P4.35 50.8,69.85 53.975,66.675 R11.10
DIOC20: P4.37 R11.11 | length 8.9
  Bottom Layer w0.3: P4.37 53.34,69.85 55.245,67.945 R11.11
DIOC30: P4.39 R11.12 | length 8.4
  Bottom Layer w0.3: P4.39 55.88,69.85 56.515,69.215 R11.12
DIOC40: P4.41 R11.13 | length 8.4
  Bottom Layer w0.3: R11.13 57.785,69.215 58.42,69.85 P4.41
DIOC50: P4.43 R11.14 | length 8.9
  Bottom Layer w0.3: R11.14 59.055,67.945 60.96,69.85 P4.43
DIOC60: P4.45 R11.15 | length 9.4
  Bottom Layer w0.3: R11.15 60.325,66.04 63.5,69.215 P4.45
DIOC70: P4.47 R11.16 | length 9.9
  Bottom Layer w0.3: R11.16 61.595,65.405 66.04,69.85 P4.47
DIOD0: D25.3 J2.1 P1.49 P8.29 pad.EndPad@110.49,39.37 pad.StartPad@114.3,39.37 R7.9 U7.1 U8.2 | length 147.3
  Top Layer w0.3: D25.3 P1.49 ; R7.9 90.805,36.83 93.345,39.37 110.49,39.37 J2.1 114.3,9.525 ; v1(104.14,9.525) 114.3,9.525 ; v1(127.635,10.16) 127,9.525 114.3,9.525
  Bottom Layer w0.2: P8.29 52.705,13.335 60.96,21.59 64.135,21.59 P1.49
  Bottom Layer w0.3: P1.49 69.85,27.305 86.36,27.305 90.805,31.75 R7.9 ; v1(104.14,9.525) U7.1 ; v1(127.635,10.16) U8.2
DIOD1: D26.3 P2.1 P8.63 R19.1 U9.12 U9.13 | length 84.5
  Top Layer w0.3: v1(86.36,29.845) 90.17,26.035 P2.1 D26.3
  Bottom Layer w0.2: P8.63 52.705,7.874 53.721,8.89 53.721,13.081 60.96,20.32 65.405,20.32 71.12,26.035 P2.1
  Bottom Layer w0.3: R19.1 76.965,37.335 84.455,29.845 v1(86.36,29.845) ; R19.1@77.153,40.193 76.835,40.51 U9.13 U9.12
DIOD2: D27.3 P2.3 P8.64 pad.StartPad@118.745,50.89 R7.8 U4.7 U6.13 | length 106.6
  Top Layer w0.3: D27.3 P2.3
  Bottom Layer w0.2: P8.64 53.975,5.969 55.245,7.239 55.245,7.874 54.229,8.89 54.229,12.319 60.96,19.05 66.04,19.05 71.12,24.13 93.98,24.13 94.615,24.765 P2.3
  Bottom Layer w0.3: P2.3 93.345,27.305 R7.8 93.345,35.56 97.79,40.005 U4.7 97.79,44.45 99.06,45.72 115.57,45.72 118.745,48.895 U6.13
DIOD3: D28.3 P2.5 P8.31 pad.StartPad@120.015,50.89 R7.7 U4.6 U6.12 | length 101.2
  Top Layer w0.3: D28.3 P2.5
  Bottom Layer w0.2: P8.31 55.245,12.065 60.96,17.78 66.675,17.78 72.39,23.495 96.52,23.495 97.155,24.13 P2.5
  Bottom Layer w0.3: P2.5 95.885,27.305 R7.7 95.885,36.195 99.06,39.37 U4.6 99.06,43.815 100.33,45.085 116.84,45.085 120.015,48.26 U6.12
DIOD4: D29.3 P2.7 P8.32 pad.StartPad@122.555,50.89 R7.6 U4.5 U6.10 | length 104.9
  Top Layer w0.3: D29.3 P2.7
  Bottom Layer w0.2: P8.32 56.261,7.808 56.261,11.811 60.96,16.51 67.31,16.51 73.66,22.86 98.425,22.86 99.695,24.13 P2.7
  Bottom Layer w0.3: P2.7 98.425,27.305 R7.6 98.425,36.195 100.33,38.1 U4.5 100.33,43.815 100.965,44.45 118.11,44.45 122.555,48.895 U6.10
DIOD5: D30.3 P2.9 P8.66 R7.5 U4.4 | length 82.1
  Top Layer w0.3: D30.3 P2.9
  Bottom Layer w0.2: P8.66 56.515,5.969 57.531,6.985 57.531,8.128 56.769,8.89 56.769,11.049 60.96,15.24 67.945,15.24 74.93,22.225 100.33,22.225 102.235,24.13 P2.9
  Bottom Layer w0.3: U4.4 101.6,36.83 100.965,36.195 R7.5 100.965,27.305 P2.9
DIOD6: D31.3 P2.11 P8.67 R7.4 U4.3 | length 79.1
  Top Layer w0.3: D31.3 P2.11
  Bottom Layer w0.2: P8.67 58.039,5.903 58.039,8.128 59.436,9.525 63.5,9.525 75.565,21.59 102.235,21.59 104.775,24.13 P2.11
  Bottom Layer w0.3: U4.3 102.87,36.83 103.505,36.195 R7.4 103.505,27.305 P2.11
DIOD7: D32.3 P2.13 P8.34 R7.3 U4.2 | length 78.8
  Top Layer w0.3: D32.3 P2.13
  Bottom Layer w0.2: P8.34 62.799,7.554 76.2,20.955 104.14,20.955 107.315,24.13 P2.13
  Bottom Layer w0.3: U4.2 104.14,38.1 106.045,36.195 R7.3 106.045,27.305 P2.13
DIOD10: P5.1 P7.1 R12.10 | length 30.2
  Bottom Layer w0.3: P7.1 92.075,90.17 93.345,88.9 93.345,73.025 P5.1 92.075,69.85 95.25,66.675 R12.10
DIOD20: P5.3 P7.3 R12.11 | length 29.6
  Bottom Layer w0.3: P7.3 94.615,90.17 95.885,88.9 95.885,73.025 P5.3 94.615,69.85 96.52,67.945 R12.11
DIOD30: P5.5 P7.5 R12.12 | length 29.1
  Bottom Layer w0.3: P7.5 97.155,90.17 98.425,88.9 98.425,73.025 P5.5 97.155,69.85 97.79,69.215 R12.12
DIOD40: P5.7 P7.7 R12.13 | length 29.1
  Bottom Layer w0.3: R12.13 99.06,69.215 99.695,69.85 P5.7 100.965,73.025 100.965,88.9 99.695,90.17 P7.7
DIOD50: P5.9 P7.9 R12.14 | length 29.6
  Bottom Layer w0.3: R12.14 100.33,67.945 102.235,69.85 P5.9 103.505,73.025 103.505,88.9 102.235,90.17 P7.9
DIOD60: P5.11 P7.11 R12.15 | length 30.2
  Bottom Layer w0.3: R12.15 101.6,66.675 104.775,69.85 P5.11 106.045,73.025 106.045,88.9 104.775,90.17 P7.11
DIOD70: P5.13 P7.13 R12.16 | length 30.7
  Bottom Layer w0.3: R12.16 102.87,65.405 107.315,69.85 P5.13 108.585,73.025 108.585,88.9 107.315,90.17 P7.13
GND: C4.2 C5.1 C6.1 C7.1 C8.1 C9.1 C10.1 C11.1 C12.1 C13.1 C14.1 C15.1 C16.2 C17.2 C18.2 C19.2 C20.2 C21.1 C22.2 D1.1 D2.1 D3.1 D4.1 D5.1 D6.1 D7.1 D8.1 D9.1 D10.1 D11.1 D12.1 D13.1 D14.1 D15.1 D16.1 D17.1 D18.1 D19.1 D20.1 D21.1 D22.1 D23.1 D24.1 D25.1 D26.1 D27.1 D28.1 D29.1 D30.1 D31.1 D32.1 J1.1 J4.2 P1.2 P1.4 P1.6 P1.8 P1.10 P1.12 P1.14 P1.16 P1.18 P1.20 P1.22 P1.24 P1.26 P1.28 P1.30 P1.32 P1.34 P1.36 P1.38 P1.40 P1.42 P1.44 P1.46 P1.48 P1.50 P2.2 P2.4 P2.6 P2.8 P2.10 P2.12 P2.14 P2.15 P2.16 P3.2 P3.4 P3.6 P3.8 P3.10 P3.12 P3.14 P3.16 P4.12 P4.14 P4.16 P4.18 P4.20 P4.22 P4.24 P4.26 P4.28 P4.30 P4.32 P4.34 P4.36 P4.38 P4.40 P4.42 P4.44 P4.46 P4.48 P4.50 P5.2 P5.4 P5.6 P5.8 P5.10 P5.12 P5.14 P5.15 P5.16 P7.2 P7.4 P7.6 P7.8 P7.10 P7.12 P7.14 P7.15 P7.16 P8.11 P8.14 P8.18 P8.19 P8.20 P8.24 P8.27 P8.30 P8.33 P8.35 P8.36 P8.37 P8.39 P8.41 P8.42 P8.43 P8.46 P8.49 P8.50 P8.55 P8.56 P8.59 P8.62 P8.65 P8.68 P9.8 P11.1 R1.1 R2.1 R3.1 R4.1 R5.1 R6.1 R7.1 R8.1 U1.10 U1.19 U2.10 U2.19 U3.10 U3.19 U4.10 U4.19 U5.10 U5.19 U6.1 U6.2 U6.4 U6.8 U6.15 U7.8 U8.1 U8.8 U8.9 U8.10 U8.11 U9.7
  other v1: 116.84,3.81 129.54,3.81 141.605,3.81 102.87,4.445 155.575,5.715 90.805,6.985 116.84,8.255 127.635,8.255 102.235,10.16 40.005,13.97 71.755,13.97 74.295,13.97 81.915,13.97 86.995,13.97 92.075,13.97 11.43,14.605 20.955,14.605 26.035,14.605 28.575,14.605 141.605,15.875 79.375,19.05 84.455,19.05 89.535,19.05 134.62,19.685 139.7,19.685 109.22,20.955 116.205,23.495 116.205,28.575 74.295,29.21 78.105,29.21 74.295,33.655 78.105,33.655 8.255,41.91 30.48,41.91 50.8,41.91 69.85,41.91 92.075,41.91 132.08,41.91 84.455,49.53 113.665,49.53 81.915,51.435 27.94,53.34 42.545,53.34 49.53,53.34 62.865,53.34 70.485,53.34 104.14,53.34 144.145,53.34 151.765,53.34 113.03,55.88 123.825,58.42 2.54,64.77 5.08,64.77 7.62,64.77 22.225,64.77 24.765,64.77 27.305,64.77 29.845,64.77 43.815,64.77 46.355,64.77 48.895,64.77 51.435,64.77 64.135,64.77 67.31,64.77 70.485,64.77 73.66,64.77 106.045,64.77 107.95,64.77 78.74,65.405 81.915,65.405 85.09,65.405 88.265,65.405 91.44,65.405 116.84,65.405
NetC1_1: C1.1 U7.6 | length 4.5
  Bottom Layer w0.3: C1.1@102.87,14.475 104.01,14.475 105.41,15.875 U7.6
NetC1_2: C1.2 R13.1 U7.7 | length 7.8
  Bottom Layer w0.3: R13.1 U7.7
NetC2_1: C2.1 U7.14 | length 4.5
  Bottom Layer w0.3: U7.14 113.03,12.065 114.43,13.465 C2.1@115.57,13.465
NetC2_2: C2.2 R14.1 U7.15 | length 7.8
  Bottom Layer w0.3: U7.15 R14.1
NetC3_1: C3.1 R15.1 U8.15 | length 8.4
  Bottom Layer w0.3: U8.15 R15.1
NetC3_2: C3.2 U8.14 | length 4.5
  Bottom Layer w0.3: U8.14 140.97,11.43 142.37,12.83 C3.2@143.51,12.83
NetJ1_2: J1.2 P4.2 P4.4 P4.6 P4.8 P4.10 P6.2 P6.4 P6.6 P6.8 P6.10
NetJ2_2: J2.2 J3.1 U6.3 | length 37.9
  Top Layer w0.3: J3.1 112.9,62.23 109.09,58.42 109.09,47.12 113.03,43.18 114.935,43.18 116.84,41.275 J2.2
  Bottom Layer w0.3: J3.1 114.3,60.96 117.475,57.785 U6.3
NetJ2_3: J2.3 pad.EndPad@116.522,26.352 pad.StartPad@119.38,39.37 U7.5 | length 31
  Bottom Layer w0.3: U7.5 108.585,14.605 109.22,15.24 109.22,19.05 116.522,26.352 119.38,29.21 J2.3
NetJ3_2: J3.2 pad.StartPad@116.84,62.23 U4.9 U9.9 | length 61.5
  Top Layer w0.3: v1(90.17,39.37) 90.17,45.085 109.855,64.77 115.57,64.77 116.84,63.5 J3.2
  Bottom Layer w0.3: U9.9 81.915,41.91 84.455,39.37 v1(90.17,39.37) 94.615,39.37 95.25,40.005 U4.9
NetJ3_3: J3.3 U6.6 | length 7.2
  Bottom Layer w0.3: J3.3 121.285,60.325 U6.6
NetJ4_1: J4.1 P6.12 P6.14 P6.16 P6.18 P6.20 P6.22 P6.24 P6.26 P6.28 P6.30 P6.32 P6.34 P6.36 P6.38 P6.40 P6.42 P6.44 P6.46 P6.48 P6.50 | length 51.1
  Bottom Layer w1.6: P6.12 P6.14 P6.16 P6.18 P6.20 P6.22 P6.24 P6.26 P6.28 P6.30 P6.32 P6.34 P6.36 P6.38 P6.40 P6.42 P6.44 P6.46 J4.1
NetP3_5: P3.5 R8.4 U5.7 | length 17.1
  Bottom Layer w0.3: P3.5 135.89,27.305 R8.4 135.89,36.195 137.795,38.1 U5.7
NetP3_7: P3.7 R8.5 U5.6 | length 16.6
  Bottom Layer w0.3: U5.6 139.065,36.83 138.43,36.195 R8.5 138.43,27.305 P3.7
NetP3_9: P3.9 R8.6 U5.5 | length 16.6
  Bottom Layer w0.3: U5.5 140.335,36.83 140.97,36.195 R8.6 140.97,27.305 P3.9
NetP3_11: P3.11 R8.7 U5.4 | length 17.1
  Bottom Layer w0.3: U5.4 141.605,38.1 143.51,36.195 R8.7 143.51,27.305 P3.11
NetP3_13: P3.13 R8.8 U5.3 | length 17.6
  Bottom Layer w0.3: U5.3 142.875,39.37 146.05,36.195 R8.8 146.05,27.305 P3.13
NetP3_15: P3.15 R8.9 U5.2 | length 18.8
  Top Layer w0.3: P3.15@149.225,26.035 P3.15
  Bottom Layer w0.3: U5.2 144.145,40.005 148.59,35.56 R8.9 148.59,27.305 P3.15
NetR1_2: R1.2 S1.4 U6.9 | length 14.3
  Top Layer w0.3: S1.4 R1.2
  Bottom Layer w0.3: U6.9 125.82,50.89 131.445,56.515 S1.4
NetR2_2: R2.2 S1.5 U6.11 | length 15.3
  Top Layer w0.3: S1.5 R2.2
  Bottom Layer w0.3: U6.11 121.285,52.07 121.92,52.705 125.73,52.705 128.905,55.88 S1.5
NetR3_2: R3.2 S1.6 U6.14 | length 17.3
  Top Layer w0.3: S1.6 R3.2
  Bottom Layer w0.3: U6.14 117.475,52.705 118.11,53.34 124.46,53.34 126.365,55.245 S1.6
NetR9_1: R9.1 U1.18 | length 3.6
  Bottom Layer w0.3: U1.18 R9.1
NetR9_2: R9.2 U1.17 | length 3.6
  Bottom Layer w0.3: U1.17 R9.2
NetR9_3: R9.3 U1.16 | length 3.6
  Bottom Layer w0.3: U1.16 R9.3
NetR9_4: R9.4 U1.15 | length 3.6
  Bottom Layer w0.3: U1.15 R9.4
NetR9_5: R9.5 U1.14 | length 3.6
  Bottom Layer w0.3: U1.14 R9.5
NetR9_6: R9.6 U1.13 | length 3.6
  Bottom Layer w0.3: U1.13 R9.6
NetR9_7: R9.7 U1.12 | length 3.6
  Bottom Layer w0.3: U1.12 R9.7
NetR9_8: R9.8 U1.11 | length 3.6
  Bottom Layer w0.3: U1.11 R9.8
NetR10_1: R10.1 U2.18 | length 3.6
  Bottom Layer w0.3: U2.18 R10.1
NetR10_2: R10.2 U2.17 | length 3.6
  Bottom Layer w0.3: U2.17 R10.2
NetR10_3: R10.3 U2.16 | length 3.6
  Bottom Layer w0.3: U2.16 R10.3
NetR10_4: R10.4 U2.15 | length 3.6
  Bottom Layer w0.3: U2.15 R10.4
NetR10_5: R10.5 U2.14 | length 3.6
  Bottom Layer w0.3: U2.14 R10.5
NetR10_6: R10.6 U2.13 | length 3.6
  Bottom Layer w0.3: U2.13 R10.6
NetR10_7: R10.7 U2.12 | length 3.6
  Bottom Layer w0.3: U2.12 R10.7
NetR10_8: R10.8 U2.11 | length 3.6
  Bottom Layer w0.3: U2.11 R10.8
NetR11_1: R11.1 U3.18 | length 3.6
  Bottom Layer w0.3: U3.18 R11.1
NetR11_2: R11.2 U3.17 | length 3.6
  Bottom Layer w0.3: U3.17 R11.2
NetR11_3: R11.3 U3.16 | length 3.6
  Bottom Layer w0.3: U3.16 R11.3
NetR11_4: R11.4 U3.15 | length 3.6
  Bottom Layer w0.3: U3.15 R11.4
NetR11_5: R11.5 U3.14 | length 3.6
  Bottom Layer w0.3: U3.14 R11.5
NetR11_6: R11.6 U3.13 | length 3.6
  Bottom Layer w0.3: U3.13 R11.6
NetR11_7: R11.7 U3.12 | length 3.6
  Bottom Layer w0.3: U3.12 R11.7
NetR11_8: R11.8 U3.11 | length 3.6
  Bottom Layer w0.3: U3.11 R11.8
NetR12_1: R12.1 U4.18 | length 3.6
  Bottom Layer w0.3: U4.18 R12.1
NetR12_2: R12.2 U4.17 | length 3.6
  Bottom Layer w0.3: U4.17 R12.2
NetR12_3: R12.3 U4.16 | length 3.6
  Bottom Layer w0.3: U4.16 R12.3
NetR12_4: R12.4 U4.15 | length 3.6
  Bottom Layer w0.3: U4.15 R12.4
NetR12_5: R12.5 U4.14 | length 3.6
  Bottom Layer w0.3: U4.14 R12.5
NetR12_6: R12.6 U4.13 | length 3.6
  Bottom Layer w0.3: U4.13 R12.6
NetR12_7: R12.7 U4.12 | length 3.6
  Bottom Layer w0.3: U4.12 R12.7
NetR12_8: R12.8 U4.11 | length 3.6
  Bottom Layer w0.3: U4.11 R12.8
NetU1_1: U1.1 U2.1 U4.8 U9.8 | length 95.4
  Bottom Layer w0.3: U1.1 21.59,43.815 22.86,45.085 43.815,45.085 ; U2.1 43.815,45.085 ; U9.8 85.725,44.59 ; U4.8 96.52,43.815 95.745,44.59 85.725,44.59 ; 43.815,45.085 66.675,45.085 69.85,48.26 71.12,48.26 75.565,52.705 83.185,52.705 85.725,50.165 85.725,44.59
NetU7_9: U7.9 U7.13 | length 7.9
  Bottom Layer w0.3: U7.13 110.49,13.335 109.855,13.97 109.855,17.78 110.49,18.415 U7.9
NetU7_10: U7.10 U8.4 | length 25
  Bottom Layer w0.3: U7.10 125.73,17.145 130.175,12.7 U8.4
NetU9_10: U9.10 U9.11 | length 1.3
  Bottom Layer w0.3: U9.11 U9.10
REQ1: P8.2 U5.11 | length 211.3
  Top Layer w0.3: P8.2 16.444,7.554 15.24,6.35 15.24,4.445 17.78,1.905 125.73,1.905 144.78,20.955 v1(151.13,20.955)
  Bottom Layer w0.3: U5.11 133.985,52.705 137.795,56.515 153.035,56.515 155.575,53.975 155.575,25.4 v1(151.13,20.955)
"START TRIG I": P3.3 R8.3 U5.8 | length 17.6
  Bottom Layer w0.3: P3.3 133.35,27.305 R8.3 133.35,36.195 136.525,39.37 U5.8
STROBE: P4.49 R12.9 | length 28.8
  Bottom Layer w0.3: P4.49 76.68,63.655 R12.9
VCC: C4.1 C5.2 C6.2 C7.2 C8.2 C9.2 C10.2 C11.2 C12.2 C13.2 C14.2 C15.2 C16.1 C17.1 C18.1 C19.1 C20.1 C21.2 D1.2 D2.2 D3.2 D4.2 D5.2 D6.2 D7.2 D8.2 D9.2 D10.2 D11.2 D12.2 D13.2 D14.2 D15.2 D16.2 D17.2 D18.2 D19.2 D20.2 D21.2 D22.2 D23.2 D24.2 D25.2 D26.2 D27.2 D28.2 D29.2 D30.2 D31.2 D32.2 J5.1 P9.5 pad.EndPad@17.145,16.51 pad.StartPad@36.21,19.295 R13.2 R13.3 R14.2 R14.3 R15.2 R15.3 R19.2 S1.1 S1.2 S1.3 U1.20 U2.20 U3.1 U3.20 U4.1 U4.20 U5.1 U5.20 U6.16 U7.2 U7.3 U7.11 U7.16 U8.3 U8.16 U9.14 | length 666.7
  Top Layer w0.3: v1(66.675,41.91) v1(66.675,47.625) ; v1(105.41,47.625) 107.95,45.085 v1(107.95,41.91)
  Top Layer w0.5: D1.2 8.27,17.765 9.525,16.51 10.81,16.51 D2.2 ; 13.35,16.51 D3.2 ; 15.89,16.51 D4.2 ; 18.43,16.51 D5.2 ; 20.97,16.51 D6.2 ; 23.51,16.51 D7.2 ; 26.05,16.51 D8.2 ; 28.59,16.51 D9.2 ; 31.13,16.51 D10.2 ; 33.67,16.51 D11.2 ; 36.21,16.51 D12.2 ; 38.75,16.51 D13.2 ; 41.29,16.51 D14.2 ; 43.83,16.51 D15.2 ; 46.37,16.51 D16.2 ; 48.91,16.51 D17.2 ; 51.45,16.51 D18.2 ; 53.99,16.51 D19.2 ; 56.53,16.51 D20.2 ; 59.07,16.51 D21.2 ; 61.61,16.51 D22.2 ; 64.15,16.51 D23.2 ; 66.69,16.51 D24.2 ; 69.215,16.51 69.23,16.525 D25.2 ; 92.725,16.525 D26.2 ; 95.265,16.525 D27.2 ; D28.2 97.805,17.795 96.52,16.51 97.155,16.51 98.425,15.24 100.33,15.24 ; D29.2 100.345,15.255 100.33,15.24 ; D30.2 102.885,15.255 102.87,15.24 ; D31.2 105.425,15.255 105.41,15.24 ; D32.2 107.965,16.525 106.68,15.24 105.41,15.24 ; 100.33,15.24 102.87,15.24 ; 102.87,15.24 105.41,15.24
  Top Layer w1.6: 10.81,16.51 13.35,16.51 15.89,16.51 v1(17.145,16.51) 18.43,16.51 20.97,16.51 23.51,16.51 26.05,16.51 28.59,16.51 31.13,16.51 33.67,16.51 36.21,16.51 38.75,16.51 41.29,16.51 43.83,16.51 46.37,16.51 48.91,16.51 51.45,16.51 53.99,16.51 56.53,16.51 59.07,16.51 61.61,16.51 64.15,16.51 66.69,16.51 69.215,16.51 v1(76.2,16.51) ; v1(66.675,47.625) v1(72.39,47.625) 76.2,47.625 ; v1(88.9,47.625) 76.2,47.625 ; 96.52,16.51 95.265,16.51 95.265,16.525 92.725,16.525 76.215,16.525 v1(76.2,16.51) ; v1(114.3,47.625) v1(124.46,47.625) ; v1(76.2,16.51) 76.2,47.625
  Bottom Layer w0.3: U3.1 66.57,41.805 v1(66.675,41.91) ; R13.3 U7.3 U7.2 ; U4.1 105.515,41.91 v1(107.95,41.91) ; U7.11 R14.3 ; U8.3 136.525,11.43 137.16,10.795 137.16,9.525 137.795,8.89 U8.16 ; U5.1 145.415,47.625
  Bottom Layer w0.6: U1.20 25.165,50.905 C12.2@25.27,50.8 ; U2.20 46.755,50.905 46.757,50.904 46.882,50.848 C10.2@46.99,50.8 ; U3.20 67.71,50.905 C11.2@67.815,50.8 ; R19.2 72.47,41.7 72.47,44.45 72.61,44.59 U9.14 ; U4.20 108.985,50.905 109.09,50.8 C6.2@109.22,50.67 ; U7.16 112.265,8.88 C9.2@112.265,5.715 ; C5.2@111.76,50.67 111.98,50.89 U6.16 ; C8.2@138.3,5.715 138.3,6.855 139.56,8.115 U8.16 ; U5.20 148.99,50.905 C7.2@149.095,50.8
  Bottom Layer w1: C12.2@25.27,50.8 25.27,47.755 25.4,47.625 ; 46.99,47.625 C10.2@46.99,50.8 ; v1(66.675,47.625) 67.815,48.765 C11.2@67.815,50.8 ; C21.2@72.47,44.45 v1@72.47,47.625 ; C17.1 C13.2 99.565,6.985 99.565,11.56 R13.3 R13.2 ; C19.1 C9.2 C9.2@112.265,5.715 ; C6.2@109.09,50.8 109.09,48.39 109.22,48.26 ; 111.76,48.26 C5.2 C5.2@111.76,50.67 ; R14.3 R14.2 124.965,10.29 124.965,5.715 C14.2 C16.1 ; C18.1 C15.2 150.365,5.715 150.365,12.57 R15.2 R15.3 ; 149.095,48.26 C7.2@149.095,50.8
  Bottom Layer w1.6: J5.1 v1(17.145,16.51) ; 25.4,47.625 46.99,47.625 v1(66.675,47.625) ; v1(76.2,16.51) 90.805,1.905 97.155,1.905 ; v1(88.9,47.625) v1(105.41,47.625) v1(114.3,47.625) ; C17.1 96.115,2.945 97.155,1.905 ; C19.1 108.815,2.135 108.585,1.905 ; C16.1 121.515,2.135 121.285,1.905 ; v1(124.46,47.625) 131.445,47.625 ; S1.1 S1.2 S1.3 131.445,68.58 137.485,74.62 139.065,74.62 ; C8.2@138.3,5.715 C8.2 C20.1 135.485,2.135 135.255,1.905 ; C18.1 146.915,2.77 146.05,1.905 135.255,1.905 ; 149.225,48.26 148.59,47.625 145.415,47.625 131.445,47.625 ; P9.5 154.63,74.62 C4.1 139.065,74.62 ; 97.155,1.905 108.585,1.905 ; 108.585,1.905 121.285,1.905 ; 121.285,1.905 135.255,1.905 ; 131.445,47.625 131.445,53.34 139.065,60.96 139.065,74.62
VDD: 
pads on no net: P6.1 P6.3 P6.5 P6.7 P6.9 P6.11 P6.13 P6.15 P6.17 P6.19 P6.21 P6.23 P6.25 P6.27 P6.29 P6.31 P6.33 P6.35 P6.37 P6.39 P6.41 P6.43 P6.45 P6.47 P6.49 P8.4 P8.5 P8.6 P8.7 P8.8 P8.9 P8.38 P8.40 P8.69 P8.70 P9.0 P9.1 P9.2 P9.3 P9.4 P9.6 P9.7 R7.2 U5.13 U5.14 U5.15 U5.16 U5.17 U5.18 U6.5 U6.7 U7.4 U7.12 U8.5 U8.6 U8.7 U8.12 U8.13 U9.1 U9.2 U9.3 U9.4 U9.5 U9.6

## Polygon pours and split planes (outlines as drawn)
NetJ1_2 on Top Layer "BottomLayer-No Net" (solid, pour order 5): 6.35,95.885 19.05,95.885 19.05,69.85 6.35,69.85 1.27,69.85 1.27,79.375 6.35,79.375
GND on Top Layer "BottomLayer-No Net" (solid, pour order 9): 0,0 160,0 160,100 0,100
GND on Bottom Layer "BottomLayer-No Net" (solid, pour order 7): 0,0 160,0 160,100 0,100
no net on Internal Plane 1 (split plane): 159.49,90 159.49,0.51 0.51,0.51 0.51,99.49 159.49,99.49
no net on Internal Plane 2 (split plane): 159.49,90 159.49,0.51 0.51,0.51 0.51,99.49 159.49,99.49

## Keep-outs
Keep-Out Layer:
  lines w0.254: 0,0 160,0 160,100 0,100 0,0

## Other copper
Bottom Layer:
  pour cut-out: 108.585,13.97 106.045,13.97 104.775,12.7 102.87,12.7 100.965,10.795 95.25,10.795 95.25,18.415 104.14,18.415 104.775,17.78 104.775,17.145 105.41,16.51 108.585,16.51
  pour cut-out: 109.855,10.16 113.03,10.16 114.3,8.89 123.19,8.89 123.19,17.145 116.84,17.145 112.395,12.7 109.855,12.7
  pour cut-out: 138.06,12.065 140.335,12.065 142.24,13.97 144.78,13.97 146.05,15.24 146.05,16.51 151.765,16.51 151.765,8.255 142.24,8.255 140.875,9.525 138.06,9.525
  text "Driver4Bus V1.1" at 149.86,93.345 h3
  text "IQOQI, Chicken 2012" at 149.86,90.805 h3

## Silkscreen, mask and mechanical layers (free items; w line width, h text height)
Bottom Overlay:
  text "J3: Subbus" at 145.415,83.82 h1.5
  text "1-2 wihtout" at 145.415,81.28 h1.5
  text "2-3 with" at 145.415,78.74 h1.5
  text "+" at 4.445,68.58 h2
  text "+5V for DDS" at 0.635,67.945 h1.2 r270
  text "LSB" at 128.27,67.945 h1.5
  text "1" at 114.3,64.135 h1.25
  text "J2: Strobe from" at 90.805,60.96 h1.52
  text "1-2 Bus" at 90.805,58.42 h1.52
  text "2-3 Generator" at 91.44,55.88 h1.52
  text "1" at 114.3,41.275 h1.25
  text "+5V" at 12.7,12.065 h1.5
Mechanical 1:
  lines w0.254: -15.508,1.524 -15,0 ; -15.508,98.476 -15,100 ; -15.254,0 -14.746,0 ; -15.254,100 -14.746,100 ; -15,44.261 -15,0 ; -15,55.739 -15,100 ; -14.492,1.524 -15,0 ; -14.492,98.476 -15,100 ; 0,-18.254 0,-17.746 ; 1.524,-18.508 0,-18 ; 1.524,-17.492 0,-18 ; 69.261,-18 0,-18 ; 80.739,-18 150,-18 ; 148.476,-18.508 150,-18 ; 148.476,-17.492 150,-18 ; 150,-18.254 150,-17.746
  lines w0.6: 0,0 160,0 160,100 0,100 0,0
  text "100 (mm)" at -14.086,44.515 h1.52 r90
  text "150 (mm)" at 69.515,-18.914 h1.52

## Text inside footprints (layer, text, board x,y; h text height)
P1: Top Overlay "50" at 70.612,28.067 h1.27; Top Overlay "49" at 70.612,25.527 h1.27; Top Overlay "1" at 5.08,25.527 h1.27; Top Overlay "2" at 5.08,28.067 h1.27
P2: Top Overlay "2" at 89.535,28.067 h1.27; Top Overlay "1" at 89.535,25.527 h1.27; Top Overlay "15" at 111.379,25.527 h1.27; Top Overlay "16" at 111.379,28.067 h1.27
P3: Top Overlay "2" at 129.54,28.067 h1.27; Top Overlay "1" at 129.54,25.527 h1.27; Top Overlay "15" at 151.384,25.527 h1.27; Top Overlay "16" at 151.384,28.067 h1.27
P4: Top Overlay "2" at 5.08,73.787 h1.27; Top Overlay "1" at 5.08,71.247 h1.27; Top Overlay "49" at 70.612,71.247 h1.27; Top Overlay "50" at 70.612,73.787 h1.27
P5: Top Overlay "2" at 89.535,73.787 h1.27; Top Overlay "1" at 89.535,71.247 h1.27; Top Overlay "15" at 111.379,71.247 h1.27; Top Overlay "16" at 111.379,73.787 h1.27
P6: Top Overlay "2" at 5.08,93.472 h1.27; Top Overlay "1" at 5.08,90.932 h1.27; Top Overlay "49" at 70.612,90.932 h1.27; Top Overlay "50" at 70.612,93.472 h1.27
P7: Top Overlay "2" at 89.535,93.472 h1.27; Top Overlay "1" at 89.535,90.932 h1.27; Top Overlay "15" at 111.379,90.932 h1.27; Top Overlay "16" at 111.379,93.472 h1.27
P8: Top Overlay "36" at 19.665,2.669 h1.5 r180; Top Overlay "68" at 60.305,2.669 h1.5 r180; Top Overlay "33" at 59.035,12.734 h1.5 r180; Top Overlay "1" at 17.395,12.734 h1.5 r180